# EAGLE board riffle-beta-0.1.4 (EAGLE 7.5.0)
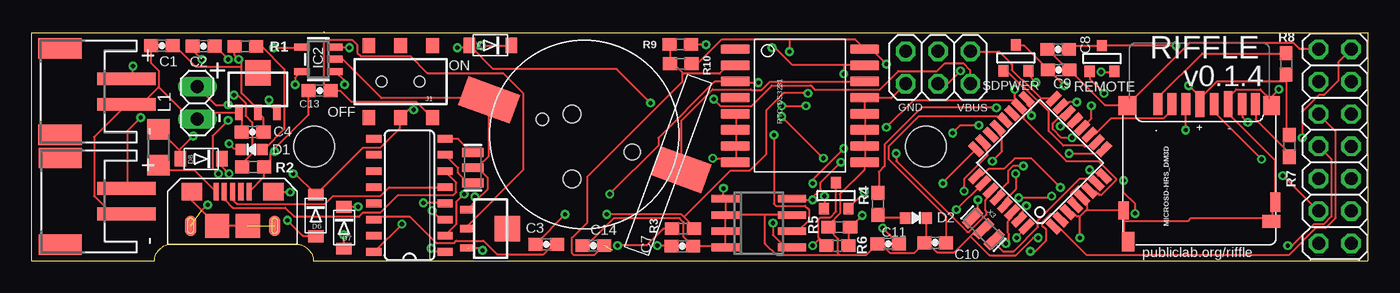
[diagram p0: board, top side]
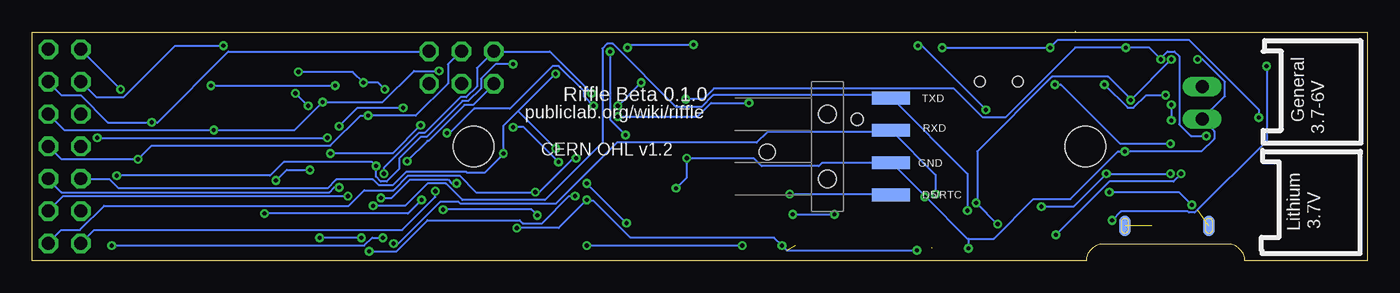
[diagram p1: board, bottom side, seen from below]

Size 104.8 x 18.01 mm. Coordinates in mm from the lower left corner, seen from the top.
Outline: 22.91,18.01 22.96,18.01
Outline: 0,0 0,17.96 104.8,17.96 104.8,0 22.07,0 arc90 20.75,1.32 10.95,1.32 arc90 9.63,0 0,0
Copper layers (1*16): Top 0.0356mm / dielectric 1.5011mm / Bottom 0.0356mm
Design rules "LaenPCBOrder": minimum track width 6mil, minimum drill 13mil, track to track 6mil, track to pad 6mil, pad to pad 6mil, via to via 6mil, smd to smd 6mil, copper to edge 15mil, drill to drill 6mil, minimum pad ring 7mil, minimum via ring 7mil, stop-mask expansion 3mil, vias tented up to drill 0mil, thermal gap 10mil
Holes 3.2 mm at 70.13,9 22.13,9

## Footprints (pad centres in the part's own frame; a part is rotated, then mirrored left to right if it is on the bottom)
BATTCON_12MM_SMT = smd 2.4 x 4.3: P$1 0,11.96 | smd 2.4 x 4.2: P$2 0,-4.1 | hole 0.95: 0,7.5 | hole 1.25: 0,0
SOT-23 = smd 0.787 x 0.889: 1 0.025,-1.016; 2 -0.94,1.016; 3 0.991,1.016
0603-CAP = smd 1.1 x 1: 1 -0.85,0; 2 0.85,0
JST-PH-2-SMT-RA = smd 1 x 4.6: 1 1,-3.7; 2 -1,-3.7 | smd 1.6 x 3.4: NC1 -3.4,1.5; NC2 3.4,1.5
0603-LED = smd 0.8 x 0.9: MINUS -0.85,0; PLUS 0.85,0
SOD-123FL = smd 0.91 x 1.22: A 1.637,0; C -1.637,0
TQFP32-08 = smd 1.27 x 0.559: 1 -4.293,2.8; 2 -4.293,2; 3 -4.293,1.2; 4 -4.293,0.4; 5 -4.293,-0.4; 6 -4.293,-1.2; 7 -4.293,-2; 8 -4.293,-2.8; 17 4.293,-2.8; 18 4.293,-2; 19 4.293,-1.2; 20 4.293,-0.4; 21 4.293,0.4; 22 4.293,1.2; 23 4.293,2; 24 4.293,2.8 | smd 0.559 x 1.27: 9 -2.8,-4.293; 10 -2,-4.293; 11 -1.2,-4.293; 12 -0.4,-4.293; 13 0.4,-4.293; 14 1.2,-4.293; 15 2,-4.293; 16 2.8,-4.293; 25 2.8,4.293; 26 2,4.293; 27 1.2,4.293; 28 0.4,4.293; 29 -0.4,4.293; 30 -1.2,4.293; 31 -2,4.293; 32 -2.8,4.293
SO16 = smd 0.6 x 1.2: 1 -4.445,-2.8; 2 -3.175,-2.8; 3 -1.905,-2.8; 4 -0.635,-2.8; 5 0.635,-2.8; 6 1.905,-2.8; 7 3.175,-2.8; 8 4.445,-2.8; 9 4.445,2.8; 10 3.175,2.8; 11 1.905,2.8; 12 0.635,2.8; 13 -0.635,2.8; 14 -1.905,2.8; 15 -3.175,2.8; 16 -4.445,2.8
SOT89 = smd 0.58 x 1.2: 1 -1.5,-1.8; 2 0,-1.8; 3 1.5,-1.8 | smd 2 x 2: 4 0,1.3
SO-08 = smd 0.6 x 2.2: 1 -1.905,-2.6; 2 -0.635,-2.6; 3 0.635,-2.6; 4 1.905,-2.6; 5 1.905,2.6; 6 0.635,2.6; 7 -0.635,2.6; 8 -1.905,2.6
2X03 = drill 1.016 octagon: 1 -2.54,-1.27; 2 -2.54,1.27; 3 0,-1.27; 4 0,1.27; 5 2.54,-1.27; 6 2.54,1.27
AYZ0202 = smd 1 x 1.15: 1 -2.5,2.825; 2 0,2.825; 3 2.5,2.825; 4 -2.5,-2.825; 5 0,-2.825; 6 2.5,-2.825 | hole 0.85: 1.5,0; -1.5,0
MICROUSB-RIGHT = smd 0.4 x 1.35: 1 -1.3,1.27; 2 -0.65,1.27; 3 0,1.27; 4 0.65,1.27; 5 1.3,1.27 | smd 0.9 x 1.6: S1 -3.3,-1.4; S2 3.3,-1.4 | smd 1.6 x 1.4: S3 -3.2,1.27; S4 3.2,1.27 | smd 1.9 x 1.9: S5 -1.2,-1.405; S6 1.2,-1.405 | smd 0.9 x 1.6 bottom: S7 -3.3,-1.4; S8 3.3,-1.4
1X02 = drill 1.016 long: 1 -1.27,0; 2 1.27,0
1X04-SMD = smd 1 x 3: 1 -3.81,5; 2 -1.27,5; 3 1.27,5; 4 3.81,5 | hole 1.4: -2.54,0; 2.54,0
2X07 = drill 1.016 octagon: 1 -7.62,-1.27; 2 -7.62,1.27; 3 -5.08,-1.27; 4 -5.08,1.27; 5 -2.54,-1.27; 6 -2.54,1.27; 7 0,-1.27; 8 0,1.27; 9 2.54,-1.27; 10 2.54,1.27; 11 5.08,-1.27; 12 5.08,1.27; 13 7.62,-1.27; 14 7.62,1.27
R1206 = smd 1.6 x 1.803: 1 -1.422,0; 2 1.422,0
0603-NO = smd 1.1 x 1: 1 -0.85,0; 2 0.85,0
DS3231 = smd 0.762 x 2.286: 1 -4.445,-5.08; 2 -3.175,-5.08; 3 -1.905,-5.08; 4 -0.635,-5.08; 5 0.635,-5.08; 6 1.905,-5.08; 7 3.175,-5.08; 8 4.445,-5.08; 9 4.445,5.08; 10 3.175,5.08; 11 1.905,5.08; 12 0.635,5.08; 13 -0.635,5.08; 14 -1.905,5.08; 15 -3.175,5.08; 16 -4.445,5.08
SOT23-5 = smd 0.55 x 1.2: 1 -0.95,-1.3; 2 0,-1.3; 3 0.95,-1.3; 4 0.95,1.3; 5 -0.95,1.3
DM3D = smd 0.7 x 1.75: CD/DAT3 8.15,0.45; CLK 4.85,0.45; CMD 7.05,0.45; DAT0 2.65,0.45; DAT1 1.6,0.45; DAT2 9.25,0.45 | smd 0.8 x 1.5: GND1 0.05,8.15 | smd 0.8 x 1.4: GND2 11.95,8.8 | smd 1.4 x 1.5: GND3 11.65,0.55 | smd 1.3 x 1.5: GND4 0.35,0.55 | smd 1 x 1.55: SW_A 11.6,11.25 | smd 1.4 x 1: SW_B 0.35,9.65 | smd 0.7 x 2.032: VDD 5.95,0.45; VSS 3.75,0.45
RESONATOR-SMD = smd 0.7 x 1.7: 1 -1.2,0; 2 0,0; 3 1.2,0

## Placement (x,y rotation side)
BAT  CR1220  [BATTCON_12MM_SMT]  47.1,8.57 70 top
BATTPOWER  FDN340P  [SOT-23]  63.12,5.14 180 top
C1  10uF  [0603-CAP]  10.2,16.92 0 top
C2  0.1uF  [0603-CAP]  13.48,16.89 180 top
C3  0.1uF  [0603-CAP]  40.37,1.31 0 top
C4  10uF  [0603-CAP]  17.32,10.13 180 top
C7  0.1uF  [0603-CAP]  51.03,1.17 180 top
C8  0.1uF  [0603-CAP]  80.53,16.62 180 top
C9  0.1uF  [0603-CAP]  80.57,15.01 180 top
C10  0.1uF  [0603-CAP]  70.86,1.44 180 top
C11  0.1uF  [0603-CAP]  67.19,1.36 0 top
C13  10uF  [0603-CAP]  22.58,13.39 180 top
C14  10uF  [0603-CAP]  44.04,1.22 180 top
CN2  [JST-PH-2-SMT-RA]  3.71,13.31 90 top
CNL  [JST-PH-2-SMT-RA]  3.72,4.7 90 top
D1  LED0603  [0603-LED]  17.23,8.76 0 top
D2  LED0603  [0603-LED]  69.37,3.38 180 top
D5  SCHOTTKY  [SOD-123FL]  35.97,16.94 180 top
D6  SCHOTTKY  [SOD-123FL]  22.28,3.58 270 top
D7  SCHOTTKY  [SOD-123FL]  24.49,2.62 270 top
D8  SCHOTTKY  [SOD-123FL]  13.28,8.03 180 top
IC1  ATMEGA328P  [TQFP32-08]  79.09,7.72 135 top
IC3  CH340G  [SO16]  29.63,5.17 90 top
IC4  MCP1700-33  [SOT89]  35.99,2.54 270 top
IC5  24AA128SN  [SO-08]  57.02,2.98 270 top
IC6  MCP1700-33  [SOT89]  17.73,13.49 0 top
ISP  [2X03]  71.1,15.2 180 top
J1  AYZ0202  [AYZ0202]  28.93,14.1 180 top
J2  [MICROUSB-RIGHT]  15.75,4.17 0 top
JP1  [1X02]  12.97,12.43 90 top
JP3  [1X04-SMD]  42.39,9 270 bottom
JP5  [2X07]  102.23,9.01 270 top
L1  500mA  [R1206]  9.93,8.94 90 top
R1  10K  [0603-NO]  16.75,16.87 180 top
R2  4.7K  [0603-NO]  17.37,7.39 180 top
R3  10K  [0603-NO]  51.09,2.55 180 top
R4  10K  [0603-NO]  66.37,4.5 90 top
R5  10K  [0603-NO]  63.35,2.66 0 top
R6  10K  [0603-NO]  63.2,1.22 180 top
R7  10K  [0603-NO]  98.65,9.05 270 top
R8  10K  [0603-NO]  98.4,15.49 270 top
R9  10K  [0603-NO]  50.91,15.5 180 top
R10  10K  [0603-NO]  50.88,17.03 180 top
REMOTE  FDN340P  [SOT-23]  83.98,15.91 180 top
RTC-DS3231  DS3231  [DS3231]  60.27,12.21 270 top
SDPWER  FDN340P  [SOT-23]  77.23,15.95 180 top
U1  MCP73831T-2ACI/OT  [SOT23-5]  22.48,15.85 90 top
U$1  MICROSD-HRS_DM3D  [DM3D]  97.6,12.78 180 top
X2  12MHz  [RESONATOR-SMD]  34.59,7.33 90 top
X3  16 MHz  [RESONATOR-SMD]  74.66,2.55 135 top

## Library data of the parts
BAT IC3 J1 X2 = SparkFunNew
BATTPOWER REMOTE SDPWER = zetex; OC_FARNELL: unknown; OC_NEWARK: unknown
C1-C4 C7-C11 C13 C14 JP3 X3 = SparkFun
CN2 CNL D5-D8 IC4 IC6 L1 = adafruit
D1 D2 = LowPowerLab
IC1 = atmel; MPN: ATMEGA8-16AU; OC_FARNELL: 9171371; OC_NEWARK: 73M8863
IC5 = microchip; MF: MICROCHIP; MPN: 24AA128-I/SN; OC_FARNELL: unknown; OC_NEWARK: 92C6842
ISP JP1 JP5 = pinhead
J2 = MF_Connectors
R1-R10 U1 = microbuilder
RTC-DS3231 = _lh-library
U$1 = hrs_DM3D-SF

## Nets
A0: IC1.23 JP5.13
A1: IC1.24 JP5.12
A2: IC1.25 JP5.10
A3: IC1.26 R5.2 R6.1
AREF: C10.1 IC1.20
D2: IC1.32 JP5.7
D3: IC1.1 JP5.5
D4: BATTPOWER.3 IC1.2
D5/RTC: IC1.9 JP3.4 RTC-DS3231.3
D6: IC1.10 SDPWER.3
D7: IC1.11 U$1.CD/DAT3
D8: IC1.12 REMOTE.3
D9: IC1.13 R4.2
D10: IC1.14 JP5.2
D+: IC3.5 J2.3
D-: IC3.6 J2.2
GND: BAT.P$1 C1.1 C2.2 C4.2 C7.1 C8.2 C9.1 C10.2 C11.1 C13.2 C14.2 CN2.2 CNL.2 D2.MINUS IC1.3 IC1.5 IC1.21 IC3.1 IC4.1 IC5.1 IC5.2 IC5.3 IC5.4 IC5.7 IC6.1 ISP.6 J2.5 JP1.1 JP3.3 JP5.1 R2.1 R5.1 RTC-DS3231.5 RTC-DS3231.6 RTC-DS3231.7 RTC-DS3231.8 RTC-DS3231.9 RTC-DS3231.10 RTC-DS3231.11 RTC-DS3231.12 RTC-DS3231.13 U1.2 U$1.GND1 U$1.GND2 U$1.GND3 U$1.GND4 U$1.SW_A U$1.SW_B U$1.VSS X2.2 X3.2
MISO: IC1.16 ISP.1 JP5.4 U$1.DAT0
MOSI: IC1.15 ISP.4 JP5.6 U$1.CMD
N$1: C13.1 IC4.2 J1.1
N$2: IC1.7 X3.1
N$3: IC1.8 X3.3
N$4: C9.2 R7.1 R8.2 SDPWER.1 U$1.VDD
N$5: D1.MINUS U1.1
N$6: R2.2 U1.5
N$7: C8.1 JP5.3 REMOTE.1
N$8: C2.1 IC3.4 IC3.16 IC6.3
N$9: J2.1 L1.1
N$11: IC3.7 X2.1
N$13: IC3.8 X2.3
N$15: BATTPOWER.1 C7.2 R6.2
N$16: R7.2 U$1.DAT1
N$17: D2.PLUS R4.1
N$18: R8.1 U$1.DAT2
N$19: D1.PLUS R1.1
RESET: C3.1 IC1.29 ISP.5 R3.1
RST: C3.2 IC3.14
RTC_BATT: BAT.P$2 RTC-DS3231.14
RXD: IC1.30 IC3.2 JP3.2
SCK: IC1.17 ISP.3 JP5.8 U$1.CLK
SCL: IC1.28 IC5.6 JP5.11 R9.1 RTC-DS3231.16
SDA: IC1.27 IC5.5 JP5.9 R10.1 RTC-DS3231.15
SLD: J2.S1 J2.S2 J2.S3 J2.S4 J2.S5 J2.S6 J2.S7 J2.S8
TXD: IC1.31 IC3.3 JP3.1
VBAT [vcc]: BATTPOWER.2 CNL.1 D5.A JP5.14 U1.3
VBUS [vcc]: C1.2 C4.1 D8.A IC6.2 ISP.2 L1.2 R1.2 U1.4
VCC: C11.2 C14.1 IC1.4 IC1.6 IC1.18 IC4.3 IC5.8 R3.2 R9.2 R10.2 REMOTE.2 RTC-DS3231.2 SDPWER.2
VDD: D5.C D6.C D7.C D8.C J1.2
VGEN1: D7.A JP1.2
VGEN2: CN2.1 D6.A

## Tracks (layer width: path | path; a pad name or v marks a point on that pad's centre or on a via)
A0  (via drill 0.33)
  Top 0.152: v73.15,5.49 73.15,6.48 74.98,8.31 74.98,8.61 74.68,8.91 74.68,9.3 IC1.23
  Bottom 0.152: v73.15,5.49 73.15,5.03 75.74,2.44 99.9,2.44 100.89,1.45 JP5.13
A1  (via drill 0.33)
  Top 0.152: v71.48,6.1 71.48,6.17 74.07,8.76 IC1.24 | v77.42,4.95 79.86,4.95 v80.01,5.11
  Bottom 0.152: v71.48,6.1 71.86,6.1 72.16,6.4 75.13,6.4 76.58,4.95 v77.42,4.95 | v80.01,5.11 102.34,5.11 103.48,3.96 JP5.12
A2  (via drill 0.33)
  Top 0.152: v80.7,5.79 78.41,8.08 77.11,8.08 76.28,7.24 75.06,7.24 74.52,6.71 74.14,6.71 IC1.25
  Bottom 0.152: v80.7,5.79 81.08,5.79 81.46,5.41 102.49,5.41 103.48,6.4 JP5.10
A3  (via drill 0.33)
  Top 0.152: R6.1 64.08,1.22 64.08,2.52 64.16,2.59 R5.2 64.24,2.67 v65.15,3.58 | v72.54,4.04 74.6,6.1 IC1.26
  Bottom 0.152: v72.54,4.04 65.61,4.04 v65.15,3.58
AREF
  Top 0.152: C10.1 71.7,3.5 67.21,8 67.21,8.99 69.57,11.35 75.97,11.35 76.28,11.05 IC1.20
D2  (via drill 0.33)
  Top 0.152: v77.27,1.83 77.27,1.91 78.03,2.67 IC1.32 | v98.53,1.22 98.91,1.22 100.58,2.9 101.35,2.9 101.96,3.5 101.96,8 100.96,8.99 JP5.7
  Bottom 0.152: v77.27,1.83 78.1,1.83 78.71,1.22 v98.53,1.22
D3
  Top 0.152: IC1.1 80.16,2.67 80.54,2.67 82.75,0.46 98.6,0.46 100.74,2.59 101.5,2.59 102.26,3.35 102.26,10.21 100.96,11.51 JP5.5
D4  (via drill 0.33)
  Top 0.152: v62.18,5.11 62.18,4.19 BATTPOWER.3 | v78.33,0.76 78.71,0.76 79.55,1.6 79.55,2.52 79.25,2.82 79.25,3.05 79.86,3.66 80.31,3.66 80.7,3.28 IC1.2
  Bottom 0.152: v62.18,5.11 62.64,5.11 64.77,2.97 66.29,2.97 66.52,3.2 73.76,3.2 76.2,0.76 v78.33,0.76
D5/RTC  (via drill 0.33)
  Top 0.152: v81.38,8.46 83.44,8.46 83.74,8.76 84.05,8.76 IC1.9 | v74.29,10.67 72.85,10.67 v72.24,10.06 | v58.83,12.19 v60.73,12.19 | v57,14.02 55.32,14.02 55.24,14.1 RTC-DS3231.3 55.17,14.1 53.57,14.1 49.15,9.68 49.15,9.07 v45.34,5.26
  Bottom 0.152: v81.38,8.46 76.5,8.46 v74.29,10.67 | v72.24,10.06 72.01,10.06 70.1,11.96 67.28,11.96 63.93,15.32 63.47,15.32 61.49,13.34 61.49,12.95 v60.73,12.19 | v57,14.02 v58.83,12.19 | v45.34,5.26 37.41,5.26 JP3.4
D6
  Top 0.152: SDPWER.3 76.28,14.94 76.5,14.94 77.8,13.64 77.88,13.64 79.78,11.73 79.78,10.21 80.92,9.07 82.52,9.07 82.6,8.99 83.21,8.99 83.52,9.3 IC1.10
D7
  Top 0.152: IC1.11 82.98,9.98 83.44,9.98 84.66,11.2 88.77,11.2 89.38,11.81 89.38,12.27 U$1.CD/DAT3
D8  (via drill 0.33)
  Top 0.152: v84.12,13.18 83.06,14.25 83.06,14.86 REMOTE.3 | v83.13,12.19 83.13,11.2 82.45,10.52 IC1.12
  Bottom 0.152: v83.13,12.19 v84.12,13.18
D9  (via drill 0.33)
  Top 0.152: v75.67,12.04 69.8,12.04 66.9,9.14 66.9,7.47 66.45,7.01 66.45,5.41 R4.2 | v80.7,10.59 81.46,10.59 81.84,10.97 IC1.13
  Bottom 0.152: v75.67,12.04 79.25,12.04 v80.7,10.59
D10  (via drill 0.33)
  Top 0.152: v81.61,9.68 80.77,9.68 80.09,10.36 80.09,10.82 80.85,11.58 81.23,11.58 IC1.14 | v99.67,9.68 99.67,11.73 100.96,13.03 101.35,13.03 102.49,14.17 102.49,15.62 103.48,16.61 JP5.2
  Bottom 0.152: v99.67,9.68 v81.61,9.68
D+
  Top 0.152: IC3.5 32.38,5.79 28.04,5.79 27.36,5.11 23.62,5.11 23.01,4.5 16.08,4.5 15.77,4.8 15.77,5.41 J2.3
D-
  Top 0.152: IC3.6 32.46,7.01 33.3,6.17 33.3,5.41 33.07,5.18 28.73,5.18 27.36,3.81 25.98,3.81 25.68,3.5 20.57,3.5 19.89,4.19 15.77,4.19 15.16,4.8 15.16,5.41 J2.2
GND  (via drill 0.33)
  Top 0.152: J2.5 17.07,5.49 18.21,6.63 18.21,7.32 R2.1 18.21,7.47 18.75,8 18.75,8.53 18.94,8.72 | 18.94,8.72 21.72,11.51 21.72,13.34 C13.2 | C4.2 16.46,11.43 16.23,11.66 IC6.1 16.15,11.66 13.49,11.66 13.03,11.2 JP1.1 12.95,11.2 12.42,11.2 9.94,13.68 | v13.33,15.85 12.65,16.54 12.65,16.84 C2.2 | 9.94,13.68 8.61,12.34 7.47,12.34 CN2.2 7.39,12.27 4.88,9.75 4.88,5.11 6.25,3.73 7.39,3.73 CNL.2 | 9.94,13.68 9.98,13.72 9.98,14.94 9.37,15.54 9.37,16.92 C1.1 | v19.05,8.61 18.94,8.72 | 34.94,4.84 35.74,5.64 35.74,6.55 34.98,7.32 34.59,7.32 X2.2 35.05,7.32 35.05,7.47 35.81,8.23 35.81,12.65 BAT.P$1 35.81,12.72 35.74,12.8 27.43,12.8 24.38,15.85 U1.2 | 34.94,4.84 34.21,4.12 IC4.1 | 55.24,8.08 55.24,8.99 RTC-DS3231.7 55.24,9.07 55.24,10.29 RTC-DS3231.6 55.24,10.36 55.24,11.51 RTC-DS3231.5 | 55.24,8.08 55.24,7.77 RTC-DS3231.8 55.24,8.08 | 32.46,0.76 IC3.1 32.38,0.76 31.55,0.76 v31.32,0.99 | v53.42,8.08 55.24,8.08 | v34.75,5.03 34.94,4.84 | 82.22,3.5 81.99,3.5 81.69,3.81 81.31,3.81 IC1.3 | 82.72,4 82.75,4.04 82.75,4.65 82.45,4.95 IC1.5 | 82.72,4 82.22,3.5 | 85.72,3.12 85.72,1.83 85.95,1.6 U$1.SW_A | 85.72,3.12 85.72,3.96 U$1.GND2 85.57,3.96 82.75,3.96 82.72,4 | 97.31,3.35 97.31,4.34 97.54,4.57 U$1.GND1 97.54,4.65 97.54,7.92 93.88,11.58 93.88,12.27 U$1.VSS 93.88,12.34 93.88,12.88 94.49,13.49 96.39,13.49 97.23,12.65 97.23,12.27 U$1.GND4 97.15,12.8 v97.84,13.49 | 97.31,3.35 97.31,3.2 U$1.SW_B 97.31,3.35 | 85.72,3.12 90.68,3.12 90.91,3.35 97.31,3.35 | C8.2 79.71,16.61 81.23,15.09 81.38,15.09 C9.1 81.46,15.01 84.2,12.27 85.88,12.27 U$1.GND3 85.95,12.27 90.83,17.14 98.98,17.14 99.44,16.69 100.89,16.69 JP5.1
  Top 0.152: IC5.2 54.41,3.66 54.41,4.88 IC5.1 54.41,4.95 54.25,5.11 v54.25,5.71 | 57.53,3.66 54.48,3.66 IC5.2 | 57.53,3.66 59.59,3.66 IC5.7 | IC5.4 54.41,1.14 51.89,1.14 C7.1 51.82,1.22 51.13,1.91 51.13,3.05 50.83,3.35 45.64,3.35 43.51,1.22 C14.2 | 54.41,1.07 IC5.4 | IC5.4 54.41,1.22 54.41,2.29 IC5.3 54.41,2.36 54.41,3.58 IC5.2 | D2.MINUS 70.18,3.35 70.18,1.6 70.03,1.45 C10.2 | C10.2 69.95,1.37 69.19,0.61 67.36,0.61 66.67,1.29 66.37,1.29 C11.1 66.29,1.29 65.46,0.46 63.4,0.46 63.36,0.49 | 63.36,0.49 63.25,0.61 63.25,1.75 62.56,2.44 62.56,2.59 R5.1 62.56,2.67 62.56,2.9 63.4,3.73 63.4,5.26 65.3,7.16 65.3,7.7 RTC-DS3231.9 65.38,7.77 65.38,8.99 RTC-DS3231.10 65.38,9.07 65.38,10.29 RTC-DS3231.11 65.38,10.36 65.38,11.51 RTC-DS3231.12 65.38,11.58 65.38,12.8 RTC-DS3231.13 65.46,12.8 67.44,12.8 68.5,13.87 ISP.6 | 73.65,1.94 72.39,0.69 71.02,0.69 70.18,1.52 C10.2 | 73.65,1.94 74.22,2.52 74.6,2.52 X3.2 | 75.74,10.52 IC1.21 75.82,10.44 75.82,10.06 76.12,9.75 76.12,8.61 v75.36,7.85 | 57.53,3.66 57.53,1.37 58.45,0.46 63.32,0.46 63.36,0.49 | v82.22,1.83 82.22,3.5 | v78.94,1.83 78.56,1.83 77.19,0.46 75.13,0.46 73.65,1.94
  Bottom 0.152: v13.33,15.85 12.95,15.85 11.2,14.1 11.2,12.95 12.95,11.2 JP1.1 12.95,11.12 12.04,10.21 12.04,9.6 13.03,8.61 v19.05,8.61 19.58,8.61 23.32,4.88 26.21,4.88 29.34,1.75 31.32,1.75 31.36,1.71 | v31.32,0.99 31.32,1.68 31.36,1.71 | 34.71,5.07 37.34,7.7 JP3.3 37.41,7.7 42.82,7.7 43.05,7.47 47.55,7.47 48.16,8.08 v53.42,8.08 53.42,6.55 v54.25,5.71 | 34.71,5.07 31.36,1.71 | v34.75,5.03 34.71,5.07 | v97.84,13.49 100.96,16.61 JP5.1 | v75.36,7.85 73.76,9.45 73.69,9.45 70.87,12.27 70.18,12.27 68.58,13.87 ISP.6 | v78.94,1.83 v82.22,1.83
MISO  (via drill 0.33)
  Top 0.152: IC1.16 80.09,12.8 79.17,12.8 77.72,14.25 77.65,14.25 76.89,15.01 76.89,15.47 75.9,16.46 73.69,16.46 ISP.1 | v95.4,10.9 95.02,11.28 95.02,12.27 U$1.DAT0
  Bottom 0.152: JP5.4 103.48,14.02 102.49,13.03 100.96,13.03 98.83,10.9 v95.4,10.9 94.95,10.9 89.38,16.46 73.69,16.46 ISP.1
MOSI  (via drill 0.33)
  Top 0.152: v81.99,12.5 81.38,12.5 81.08,12.19 80.77,12.19 IC1.15 | v90.53,10.29 90.53,12.27 U$1.CMD | v72.85,14.94 71.86,13.95 71.17,13.95 ISP.4
  Bottom 0.152: JP5.6 103.48,11.51 102.26,10.29 v90.53,10.29 84.2,10.29 v81.99,12.5 77.27,12.5 74.83,14.94 v72.85,14.94
N$1
  Top 0.152: J1.1 31.39,11.28 30.18,12.5 25.07,12.5 24.23,13.34 23.47,13.34 C13.1 23.39,13.41 22.94,13.87 22.94,17.22 23.09,17.37 25.15,17.37 25.53,16.99 25.53,16.38 25.83,16.08 29.72,16.08 31.01,14.78 36.96,14.78 38.56,13.18 38.56,7.16 34.21,2.82 34.21,2.59 IC4.2
N$2
  Top 0.152: IC1.7 83.52,6.17 83.13,6.17 82.83,6.48 82.22,6.48 78.94,3.2 78.94,2.67 77.04,0.76 76.2,0.76 75.51,1.45 75.51,1.68 X3.1
N$3  (via drill 0.33)
  Top 0.152: v82.98,7.16 83.21,7.16 83.67,6.71 84.05,6.71 IC1.8 | v85.65,6.33 85.65,5.41 86.56,4.5 v86.56,3.73 | v74.22,4.8 74.22,3.81 73.84,3.43 X3.3
  Bottom 0.152: v82.98,7.16 84.81,7.16 v85.65,6.33 | v86.56,3.73 75.29,3.73 v74.22,4.8
N$4  (via drill 0.33)
  Top 0.152: SDPWER.1 77.27,16.92 77.88,16.92 79.71,15.09 C9.2 79.78,15.01 v81,13.79 | 98.45,14.1 98.45,10.06 98.6,9.91 R7.1 | 98.45,14.1 98.45,14.63 R8.2 98.45,14.1 | 98.45,14.1 92.96,14.1 91.67,12.8 91.67,12.34 U$1.VDD 91.67,12.88 v90.75,13.79
  Bottom 0.152: v90.75,13.79 v81,13.79
N$5  (via drill 0.33)
  Top 0.152: v15.47,9.22 15.85,8.84 16.31,8.84 D1.MINUS | v24.54,13.87 24.54,14.17 23.85,14.86 U1.1
  Bottom 0.152: v15.47,9.22 19.43,9.22 24.08,13.87 v24.54,13.87
N$6  (via drill 0.33)
  Top 0.152: v15.85,13.03 16.15,13.03 16.76,12.42 16.76,11.43 17.3,10.9 17.3,8.46 16.54,7.7 16.54,7.39 R2.2 | v20.65,13.87 20.65,14.4 21.11,14.86 U1.5
  Bottom 0.152: v15.85,13.03 17.37,13.03 18.36,12.04 18.82,12.04 v20.65,13.87
N$7  (via drill 0.33)
  Top 0.152: C8.1 81.38,16.69 81.61,16.92 83.9,16.92 REMOTE.1 83.97,16.92 v89.76,16.92
  Bottom 0.152: v89.76,16.92 93.57,16.92 97.61,12.88 99.75,12.88 100.89,14.02 JP5.3
N$8  (via drill 0.33)
  Top 0.152: v29.03,2.9 26.9,0.76 IC3.16 | v30.71,4.57 32.38,4.57 IC3.4 | v15.39,15.85 14.4,16.84 C2.1 | v18.59,12.65 18.59,12.34 19.2,11.73 IC6.3
  Bottom 0.152: v29.03,2.9 v30.71,4.57 30.63,4.57 30.63,8.61 24.76,14.48 20.35,14.48 18.59,12.72 v18.59,12.65 v15.39,15.85
N$9
  Top 0.152: J2.1 14.4,5.49 12.73,7.16 10.29,7.16 9.98,7.47 L1.1
N$11
  Top 0.152: IC3.7 32.46,8.31 33.45,7.32 33.45,6.93 34.21,6.17 34.52,6.17 X2.1
N$13
  Top 0.152: IC3.8 32.46,9.6 33.45,9.6 34.52,8.53 X2.3
N$15  (via drill 0.33)
  Top 0.152: 61.8,1.75 62.33,1.22 R6.2 | 61.8,1.75 61.72,1.83 61.72,3.28 61.87,3.43 62.64,3.43 63.09,3.89 63.09,6.1 BATTPOWER.1 | v49.07,1.22 50.14,1.22 C7.2 | 61.8,1.75 v61.26,1.22
  Bottom 0.152: v61.26,1.22 v49.07,1.22
N$16
  Top 0.152: R7.2 98.6,8.23 98.6,8.53 96.01,11.12 96.01,12.27 U$1.DAT1
N$17
  Top 0.152: D2.PLUS 68.5,3.43 66.6,3.43 66.45,3.58 R4.1
N$18
  Top 0.152: R8.1 98.37,16.31 91.82,16.31 88.39,12.88 88.39,12.34 U$1.DAT2
N$19
  Top 0.152: D1.PLUS 18.14,8.84 18.29,8.84 19.81,10.36 19.81,15.09 18.06,16.84 17.6,16.84 R1.1
RESET  (via drill 0.33)
  Top 0.152: v41.83,3.66 39.55,1.37 C3.1 | v45.11,3.66 50.98,3.66 51.17,3.47 | 51.17,3.47 51.89,2.74 51.89,2.59 R3.1 | v77.19,6.86 77.19,5.64 76.35,4.8 76.35,4.42 IC1.29 | 51.17,3.47 54.79,7.09 56.31,7.09 57.61,8.38 57.61,11.81 58.98,13.18 v60.88,13.18
  Bottom 0.152: v45.11,3.66 v41.83,3.66 | v77.19,6.86 77.19,7.32 74.45,10.06 73.99,10.06 71.17,12.88 70.71,12.88 69.88,13.72 69.88,15.16 68.58,16.46 ISP.5 68.5,16.46 64.16,16.46 v60.88,13.18
RST
  Top 0.152: C3.2 41.15,1.29 40.92,1.29 40.16,0.53 36.5,0.53 35.43,1.6 33.3,1.6 33.15,1.45 31.7,1.45 29.64,3.5 27.13,3.5 26.9,3.28 IC3.14
RTC_BATT
  Top 0.152: RTC-DS3231.14 65.3,14.1 57.91,14.1 57.23,13.41 56.46,13.41 56.39,13.49 53.42,13.49 50.98,11.05 50.98,7.24 BAT.P$2
RXD  (via drill 0.33)
  Top 0.152: v33.91,5.26 33.3,4.65 33.3,2.9 32.46,2.06 IC3.2 | v76.43,1.37 76.66,1.6 76.66,2.13 76.58,2.21 76.58,3.12 76.89,3.43 76.89,3.81 IC1.30
  Bottom 0.152: v33.91,5.26 33.91,6.78 37.34,10.21 JP3.2 37.34,10.13 47.09,10.13 47.93,9.3 58.9,9.3 63.7,4.5 71.17,4.5 71.32,4.65 72.77,4.65 76.05,1.37 v76.43,1.37
SCK  (via drill 0.33)
  Top 0.152: v78.41,11.43 78.41,11.96 78.1,12.27 78.1,12.72 IC1.17 | v96.47,8 92.81,11.66 92.81,12.27 U$1.CLK
  Bottom 0.152: ISP.3 71.17,16.46 72.16,15.47 72.16,13.95 74.68,11.43 v78.41,11.43 79.02,11.43 81.38,9.07 95.4,9.07 v96.47,8 102.49,8 103.48,8.99 JP5.8
SCL  (via drill 0.33)
  Top 0.152: 59.44,17.37 64.62,17.37 65.3,16.69 RTC-DS3231.16 65.38,16.61 65.91,16.61 v67.06,15.47 | 59.44,17.37 54.1,17.37 52.27,15.54 51.82,15.54 R9.1 | v77.8,7.47 76.96,7.47 76.58,7.09 76.58,6.17 75.82,5.41 75.82,5.03 IC1.28 | v58.22,9.91 58.22,4.5 58.37,4.34 60.66,4.34 60.96,4.04 60.96,3.2 60.12,2.36 59.66,2.36 IC5.6 | 59.44,17.37 v59.44,16.46 | v98.15,6.71 100.89,3.96 JP5.11
  Bottom 0.152: v67.06,15.47 68.43,15.47 69.57,14.33 69.57,13.56 70.56,12.57 71.02,12.57 73.84,9.75 74.29,9.75 75.97,8.08 75.97,7.24 76.96,6.25 77.42,6.25 77.8,6.63 v77.8,7.47 78.1,7.77 85.04,7.77 86.11,6.71 v98.15,6.71 | v58.22,9.91 59.44,11.12 v59.44,16.46
SDA  (via drill 0.33)
  Top 0.152: v52.88,16.99 51.74,16.99 R10.1 | v58.06,16.76 58.29,16.76 59.66,15.39 63.7,15.39 | 63.7,15.39 65.3,15.39 RTC-DS3231.15 | v67.82,8.46 67.82,7.85 73.38,2.29 73.53,2.29 74.9,3.66 74.9,3.89 74.83,3.96 74.83,4.8 75.13,5.11 75.13,5.49 IC1.27 | 63.7,15.39 v63.7,14.71 | v58.14,2.97 58.14,2.06 59.05,1.14 59.59,1.14 IC5.5 | v61.26,6.1 61.26,6.4 v63.7,8.84
  Bottom 0.152: v52.88,16.99 57.84,16.99 v58.06,16.76 | v63.7,14.71 66.64,11.77 | 66.64,11.77 67.82,10.59 v67.82,8.46 67.82,8.38 69.27,6.93 70.64,6.93 70.71,7.01 75.44,7.01 76.5,5.94 77.57,5.94 78.03,6.4 80.92,6.4 81.61,5.71 97.99,5.71 98.68,6.4 100.89,6.4 JP5.9 | v61.26,6.1 v58.14,2.97 | 66.64,11.77 v63.7,8.84
SLD  (via drill 0.33)  (4 unrouted)
  Top 0.152: 13.33,3.96 14.48,2.82 J2.S5 14.55,2.82 16.92,2.82 J2.S6 | 13.33,3.96 12.57,4.72 12.57,5.41 J2.S3 | v20.27,5.41 18.97,5.41 J2.S4 | 13.33,3.96 v13.79,4.42
  Bottom 0.152: v20.27,5.41 14.78,5.41 v13.79,4.42
TXD  (via drill 0.33)
  Top 0.152: v31.39,3.96 32.08,3.28 32.38,3.28 IC3.3 | v78.03,4.34 78.03,4.19 77.5,3.66 77.5,3.28 IC1.31
  Bottom 0.152: v31.39,3.96 31.39,6.86 37.34,12.8 JP3.1 37.41,12.88 37.57,13.03 51.36,13.03 52.27,12.12 54.25,12.12 59.21,17.07 59.66,17.07 60.05,16.69 60.05,9.3 64.54,4.8 71.02,4.8 72.31,6.1 73.76,6.1 75.51,4.34 v78.03,4.34
VBAT  (via drill 0.33)
  Top 0.152: v24.92,16.76 23.85,16.76 U1.3 | v33.38,16.76 34.14,16.76 34.29,16.92 D5.A 34.37,16.92 36.19,15.09 45.87,15.09 v48.54,12.42 | v8.53,11.28 7.47,10.21 7.47,5.71 CNL.1 | v65.3,5.41 64.08,4.19 BATTPOWER.2 | v62.1,8.08 v58.83,11.35
  Bottom 0.152: v33.38,16.76 v24.92,16.76 24.31,17.37 14.02,17.37 8.53,11.89 v8.53,11.28 | JP5.14 103.48,1.45 102.49,2.44 101.04,2.44 99.14,4.34 79.93,4.34 78.71,5.56 76.43,5.56 75.29,6.71 71.25,6.71 69.95,5.41 v65.3,5.41 65,5.41 62.33,8.08 v62.1,8.08 | v48.54,12.42 51.51,12.42 52.58,11.35 v58.83,11.35
VBUS  (via drill 0.33)
  Top 0.152: 11.54,8.72 9.98,10.29 L1.2 | 11.54,8.72 11.58,8.69 11.58,8.08 D8.A | 16.46,15.24 16.46,13.18 17.68,11.96 17.68,11.73 IC6.2 17.75,11.66 18.14,11.28 18.14,10.13 C4.1 | 16.46,15.24 16.46,15.62 v16.23,15.85 15.93,16.15 15.93,16.84 R1.2 | 16.46,15.24 12.88,15.24 11.2,16.92 C1.2 | v18.97,16.76 21.11,16.76 U1.4 | v12.65,9.83 11.54,8.72 | v53.49,12.72 54.03,12.19 56.46,12.19 58.06,13.79 61.11,13.79 61.42,13.49 66.52,13.49 67.97,14.94 71.02,14.94 71.63,15.54 73.08,15.54 73.61,15.01 73.61,13.95 ISP.2
  Bottom 0.152: v12.65,9.83 13.87,9.83 14.78,10.74 14.78,16.08 15.16,16.46 15.7,16.46 16.23,15.93 v16.23,15.85 17.14,16.76 v18.97,16.76 22.94,16.76 28.42,11.28 30.18,11.28 32.46,13.56 51.28,13.56 52.12,12.72 v53.49,12.72
VCC  (via drill 0.33)  (3 unrouted)
  Top 0.152: IC1.4 81.84,4.42 81.84,4.8 81.53,5.11 81.53,5.33 82.07,5.87 82.6,5.87 82.91,5.56 IC1.6 82.98,5.49 83.44,5.49 83.74,5.18 83.9,5.18 85.04,6.33 85.04,6.48 83.67,7.85 81.15,7.85 77.8,11.2 77.8,11.81 77.5,12.12 IC1.18 | v78.79,14.02 78.18,14.63 78.18,14.94 SDPWER.2 | 77.11,12.65 77.11,12.5 77.42,12.19 IC1.18 | 77.11,12.65 v77.11,13.49 | v83.9,14.86 84.89,14.86 REMOTE.2 | v66.75,2.59 67.97,1.37 C11.2 | 59.59,4.88 IC5.8 59.66,4.88 59.74,4.8 v61.26,4.8 61.26,5.03 61.87,5.64 61.87,6.17 v63.47,7.77 | R10.2 50.06,16.99 50.06,15.54 R9.2 50.14,15.54 50.29,15.54 51.09,14.74 | 51.09,14.74 51.13,14.71 53.95,14.71 54.56,15.32 55.17,15.32 RTC-DS3231.2 | v45.95,1.22 48.23,1.22 49.53,2.52 50.22,2.52 R3.2 | 34.21,0.99 35.2,0.99 v35.36,0.84 | 44.88,1.22 44.12,0.46 42.52,0.46 42.37,0.61 42.37,1.83 43.59,3.05 43.59,6.63 51.05,14.1 51.05,14.71 51.09,14.74 | 77.11,12.65 69.19,12.65 v67.06,10.52 | 77.11,12.65 IC1.18
  Bottom 0.152: v77.11,13.49 77.65,14.02 v78.79,14.02 79.63,14.86 v83.9,14.86 | v66.75,2.59 63.47,2.59 v61.26,4.8 61.26,4.72 60.73,4.72 57.84,1.83 46.56,1.83 v45.95,1.22 45.57,0.84 v35.36,0.84 | v67.06,10.52 66.22,10.52 v63.47,7.77
VDD  (via drill 0.33)
  Top 0.152: v15.47,6.86 14.94,7.39 14.94,8 D8.C | v20.5,6.86 20.65,6.86 22.25,5.26 D6.C 22.33,5.26 25.98,8.91 27.36,8.91 28.88,10.44 28.88,11.2 J1.2 28.96,11.28 29.57,11.89 v29.95,11.89 | v25.6,4.27 24.54,4.27 D7.C | v35.28,16.92 37.57,16.92 D5.C
  Bottom 0.152: v15.47,6.86 v20.5,6.86 23.09,4.27 v25.6,4.27 | v35.28,16.92 34.98,16.92 v29.95,11.89
VGEN1  (via drill 0.33)
  Top 0.152: v24.46,2.06 24.46,0.99 D7.A | v14.63,6.86 14.17,7.32 14.17,9.83 v15.39,11.05 | v15.39,12.27 14.4,12.27 13.03,13.64 JP1.2
  Bottom 0.152: v24.46,2.06 20.27,6.25 15.24,6.25 v14.63,6.86 | v15.39,12.27 v15.39,11.05
VGEN2  (via drill 0.33)
  Top 0.152: v20.04,3.2 21.26,1.98 22.25,1.98 D6.A | v7.92,15.32 7.92,14.78 7.47,14.33 CN2.1
  Bottom 0.152: v20.04,3.2 19.35,3.89 14.1,3.89 14.02,3.81 13.56,3.81 7.92,9.45 v7.92,15.32

## Text on the board
tPlace: ON | RIFFLE | IC2 | + | v0.1.4 | - | OFF | GND | VBUS | publiclab.org/riffle
bPlace: General | Riffle Beta 0.1.0 | TXD | RXD | publiclab.org/wiki/riffle | 3.7-6V | GND | CERN OHL v1.2 | Lithium | D5/RTC | 3.7V